# Altium PCB 4_TPS63060降压--升压转换器.PcbDoc
Units mil, origin at the board's own origin, x right, y up, seen from the top; angles counter-clockwise.
Board outline 1024.61 x 551.67 mil, 2 copper layers (Top Layer, Bottom Layer); 14 components, 9 nets, 37 pads, 28 vias.
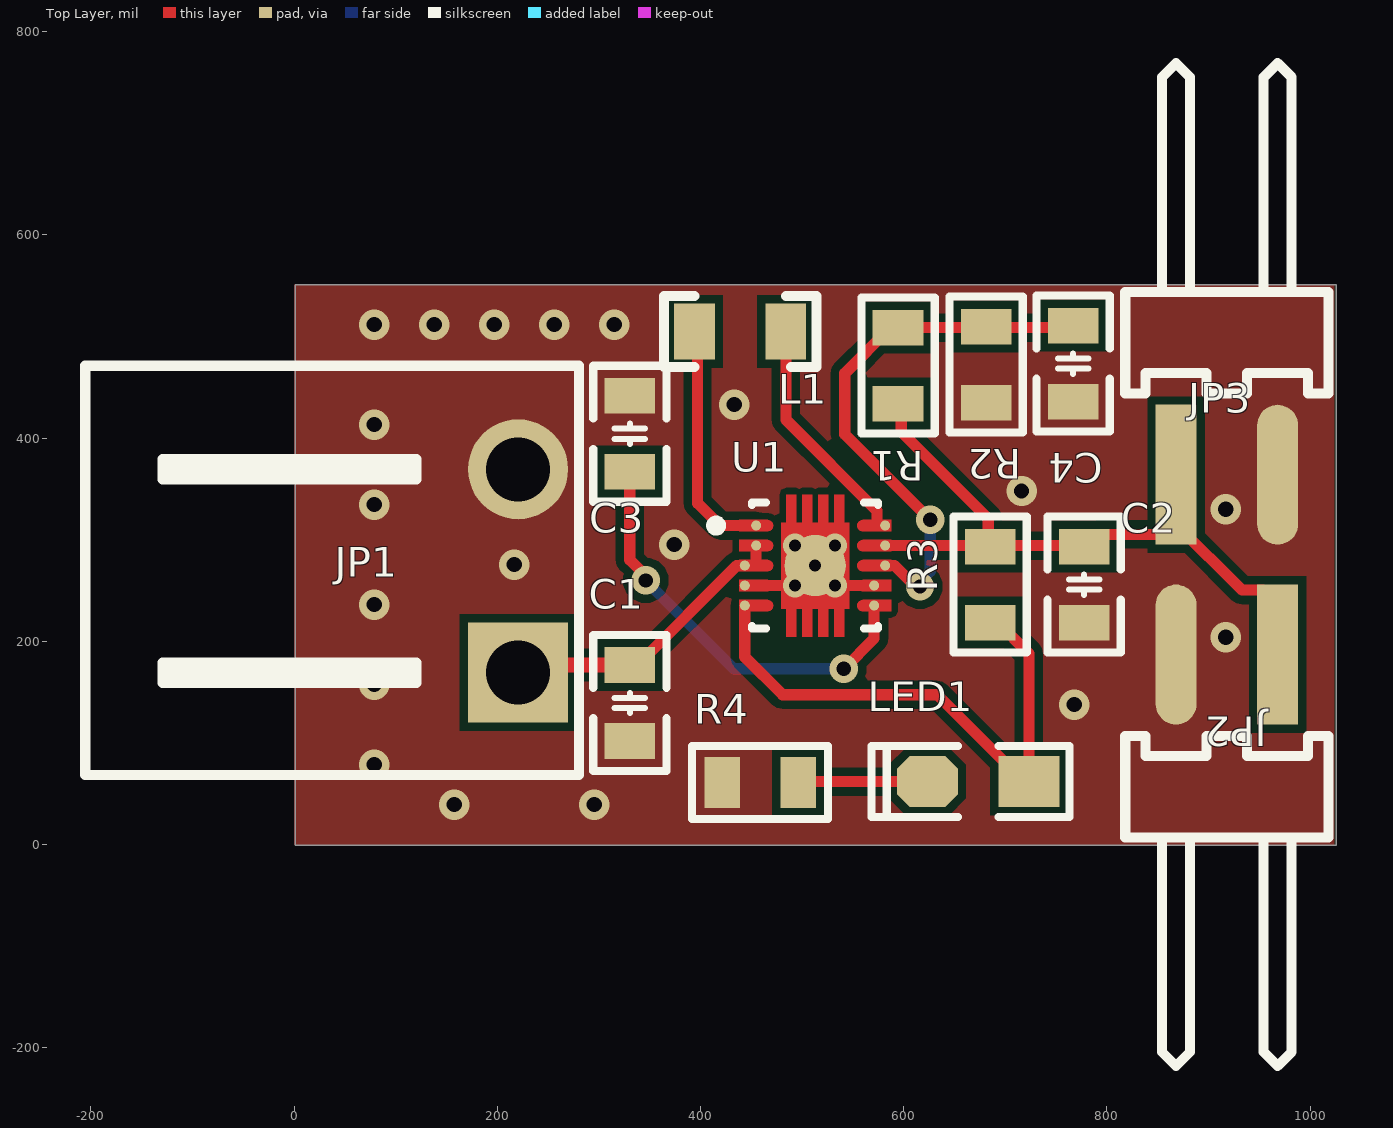
[diagram p0: Top Layer view]
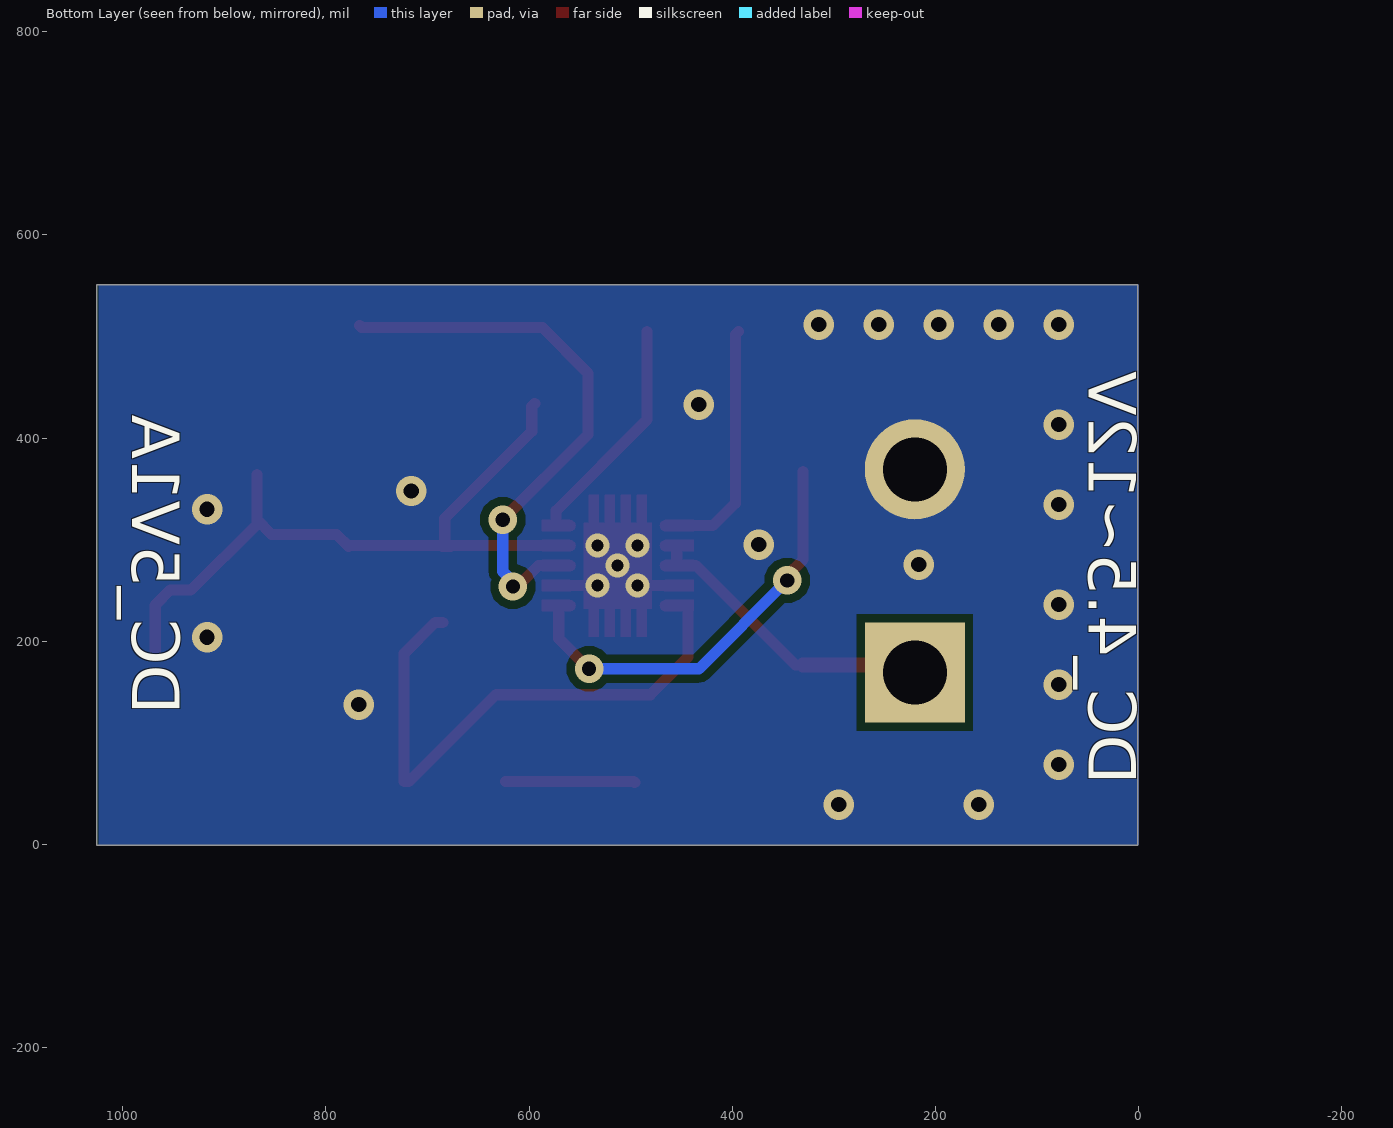
[diagram p1: Bottom Layer view, seen from below]

## Layer stack, top to bottom
Top Solder: solder mask 0.4, Solder Resist, Dk 3.5
Top Layer: signal copper 1.4
Dielectric 1: dielectric 12.6, FR-4, Dk 4.8
Bottom Layer: signal copper 1.4
Bottom Solder: solder mask 0.4, Solder Resist, Dk 3.5

## Board outline
0.98,-0.49 1025.59,-0.49 1025.59,551.18 0.98,551.18

## Design rules (kind name [scope] priority, off if disabled: settings)
Clearance [All] p1: gap=6 ignorepadtopadclearanceinfootprint=FALSE except(8: Arc-Poly Track-Poly SMDPad-Poly THPad-Poly Via-Poly Fill-Poly Poly-Poly)
PolygonConnect [All] p1: connectstyle=Direct reliefconductorwidth=10 reliefentries=4 polygonreliefangle="90 Angle" airgapwidth=10
RoutingVias [All] p1: holewidth=14 width=28 viastyle="Through Hole" minholewidth=1 minwidth=1 maxholewidth=28 maxwidth=50
SolderMaskExpansion [All] p1: expansion=4 istentingtop=FALSE
Width [All] p1: maxlimit=30 minlimit=1 preferedwidth=15
30 further rules are at their usual default settings.

## Components (designator, comment, footprint, x,y, rotation, side; value= is the part's Value field where it differs from the comment)
C1 "2X10uF" "C 0805_L" 330.39,139.33 r90 top
C2 "3X22uF" "C 0805_L" 777.56,255.91 r90 top
C3 "0.1uF" "C 0805_L" 330.39,404.33 r270 top
C4 "10pF" "C 0805_L" 766.73,473.43 r90 top
JP1 "HDR-1X2" KF2EDGK5.08-WI-2P 220.39,269.33 r90 top
JP2 "HDR-1X2" HDR2.54-WS-2P 918,187 r180 top
JP3 "HDR-1X2" HDR2.54-WS-2P 918,364 r0 top
L1 "1.5uH" "L 0805" 438.98,504.92 r0 top
LED1 "红色" "LED 0805G" 673.23,62.01 r180 top
R1 "1M" "R 0805_L" 594.49,471.46 r270 top
R2 "111K" "R 0805_L" 681.1,472.44 r90 top
R3 "1M" "R 0805_L" 685.04,255.91 r90 top
R4 "1K" "R 0805_L" 458.6,61 r0 top
U1 "TPS63060DSCR" FP-DSC0010G-MFG 512.8,274.61 r0 top

## Footprints (in the part's own frame and the unit in brackets; to place one, negate y for a bottom-side part, rotate by r counter-clockwise, add the part's x,y. Pads: shape width x height; smd on the part's side, far side on the other; paste and mask are expansions set on the pad)
"C 0805_L" [mil] "无极性贴片电容                                        淘宝ID:黄晶宝石"
  rect 35x50 smd: 1(-37.4,0) 2(37.4,0)
  silkscreen extent -67,-36 67,36, body extent -39,-24 39,24, height 20
FP-DSC0010G-MFG [mm]
  round 0.252 smd paste-1000 mask+0: 1(-1.475,1) 2(-1.475,0.5) 3(-1.76,0) 4(-1.76,-0.5) 5(-1.76,-1) 6(1.475,-1) 7(1.475,-0.5) 8(1.75,0) 9(1.75,0.5) 10(1.75,1)
  round 1.53 smd paste-1000 mask+0: 11(0,0)
  Top Layer region: -0.85,1.075 -0.725,1.075 -0.725,1.775 -0.475,1.775 -0.475,1.075 -0.325,1.075 -0.325,1.775 -0.075,1.775 -0.075,1.075 0.075,1.075 0.075,1.775 0.325,1.775 0.325,1.075 0.475,1.075 0.475,1.775 0.725,1.775 0.725,1.075 0.85,1.075 0.85,-1.075 0.725,-1.075 0.725,-1.775 0.475,-1.775 0.475,-1.075 0.325,-1.075 0.325,-1.775 0.075,-1.775 0.075,-1.075 -0.075,-1.075 -0.075,-1.775 -0.325,-1.775 -0.325,-1.075 -0.475,-1.075 -0.475,-1.775 -0.725,-1.775 -0.725,-1.075 -0.85,-1.075
  Top Layer region: 1.9,0.86 1.19,0.86 1.136,0.871 1.091,0.901 1.061,0.946 1.05,1 1.05,1 1.061,1.054 1.091,1.099 1.136,1.129 1.19,1.14 1.19,1.14 1.9,1.14
  Top Layer region: 1.9,0.36 1.19,0.36 1.136,0.371 1.091,0.401 1.061,0.446 1.05,0.5 1.05,0.5 1.061,0.554 1.091,0.599 1.136,0.629 1.19,0.64 1.19,0.64 1.9,0.64
  Top Layer region: 1.9,-0.14 1.19,-0.14 1.136,-0.129 1.091,-0.099 1.061,-0.054 1.05,0 1.05,0 1.061,0.054 1.091,0.099 1.136,0.129 1.19,0.14 1.19,0.14 1.9,0.14
  Top Layer region: 1.9,-0.64 1.19,-0.64 1.136,-0.629 1.091,-0.599 1.061,-0.554 1.05,-0.5 1.05,-0.5 1.061,-0.446 1.091,-0.401 1.136,-0.371 1.19,-0.36 1.19,-0.36 1.9,-0.36
  Top Layer region: 1.9,-1.14 1.19,-1.14 1.136,-1.129 1.091,-1.099 1.061,-1.054 1.05,-1 1.05,-1 1.061,-0.946 1.091,-0.901 1.136,-0.871 1.19,-0.86 1.19,-0.86 1.9,-0.86
  Top Layer region: -1.9,-0.86 -1.19,-0.86 -1.136,-0.871 -1.091,-0.901 -1.061,-0.946 -1.05,-1 -1.05,-1 -1.061,-1.054 -1.091,-1.099 -1.136,-1.129 -1.19,-1.14 -1.19,-1.14 -1.9,-1.14
  Top Layer region: -1.9,-0.36 -1.19,-0.36 -1.136,-0.371 -1.091,-0.401 -1.061,-0.446 -1.05,-0.5 -1.05,-0.5 -1.061,-0.554 -1.091,-0.599 -1.136,-0.629 -1.19,-0.64 -1.19,-0.64 -1.9,-0.64
  Top Layer region: -1.9,0.14 -1.19,0.14 -1.136,0.129 -1.091,0.099 -1.061,0.054 -1.05,0 -1.05,0 -1.061,-0.054 -1.091,-0.099 -1.136,-0.129 -1.19,-0.14 -1.19,-0.14 -1.9,-0.14
  Top Layer region: -1.9,0.64 -1.19,0.64 -1.136,0.629 -1.091,0.599 -1.061,0.554 -1.05,0.5 -1.05,0.5 -1.061,0.446 -1.091,0.401 -1.136,0.371 -1.19,0.36 -1.19,0.36 -1.9,0.36
  Top Layer region: -1.9,1.14 -1.19,1.14 -1.136,1.129 -1.091,1.099 -1.061,1.054 -1.05,1 -1.05,1 -1.061,0.946 -1.091,0.901 -1.136,0.871 -1.19,0.86 -1.19,0.86 -1.9,0.86
  silkscreen extent -2.6,-1.58 1.58,1.58, body extent -2,-1.88 2,1.88, height 0.25
HDR2.54-WS-2P [mm] "2P卧式贴片排针2.54"
  rect 1.02x3.5 smd: 1(-1.27,0)
  oval 1.02x3.5 smd: 2(1.27,0)
  silkscreen extent -2.54,2.03 2.54,10.29, body extent -2.54,-0.76 2.54,10.34, height 2.54
KF2EDGK5.08-WI-2P [mm] "卧插端子"
  rect 2.5x2.5 hole 1.6: 1(-2.54,0)
  round 2.5 hole 1.6: 2(2.54,0)
  silkscreen extent -5.11,-1.52 5.13,10.82, body extent -5.08,-0.5 5.08,10.8, height 8.5
"L 0805" [mil] "小功率贴片电感        淘宝ID:黄晶宝石"
  rect 40x55 smd: 1(-45,0) 2(45,0)
  silkscreen extent -75,-35 75,35, body extent -39,-24 39,24, height 35
"LED 0805G" [mil] "绿色0805LED"
  rect 60x50 smd: 1(-50,0)
  oct 60x50 smd: 2(50,0)
  silkscreen extent -90,-35 105,35, body extent -39,-25 39,25, height 32
"R 0805_L" [mil] "1/8W贴片电阻"
  rect 35x50 smd: 1(-37.4,0) 2(37.4,0)
  silkscreen extent -67,-36 67,36, body extent -39,-25 39,25, height 20

## Part data
C1 C2 C3 C4: library part C, "贴片电容", BOM名称=贴片电容, 下单链接=https://item.taobao.com/item.htm?ft=t&id=613637044352, 淘宝ID=小糖豆的小窝窝
JP1 JP2 JP3: library part "Header 2", "2P接插件", BOM名称=2P接插件, 下单链接=https://item.taobao.com/item.htm?ft=t&id=613637044352, 淘宝ID=小糖豆的小窝窝
L1: library part L, "小功率贴片电感", BOM名称=小功率贴片电感, 下单链接=https://item.taobao.com/item.htm?ft=t&id=613637044352
LED1: library part LED-SMD, "贴片LED", BOM名称=贴片LED, 下单链接=https://item.taobao.com/item.htm?ft=t&id=613637044352, 淘宝ID=小糖豆的小窝窝
R1 R2 R3 R4: library part R, "贴片电阻", BOM名称=贴片电阻, 下单链接=https://item.taobao.com/item.htm?ft=t&id=613637044352, 淘宝ID=小糖豆的小窝窝
U1: library part CMP-04918-000043-1, "IC REG BCK BST ADJ 2A 10WSON", Ambient Temperature Range High=+85°C, Ambient Temperature Range Low=-40°C, Manufacturer="Texas Instruments", Max Junction Temp=+125°C, Max Supply Voltage=12V, Min Supply Voltage=2.5V, Nominal Supply Current=30uA, Output Current=1A, Output Voltage=2.5-8V, Package=DSC0010G, Switching Frequency=2400kHz, Temperature="-40°C to +85°C", Automotive=No, Category=IC, ComponentLink2Description=Datasheet, ComponentLink2URL=http://www.ti.com/lit/ds/symlink/tps63060.pdf, Device Class L1="Integrated Circuits (ICs)", Device Class L2="Power Management ICs", Device Class L3="Voltage Regulators - Switching", Digikey Description="IC REG BCK BST ADJ 2A 10WSON", Height=0.8mm, Ipc Land Pattern Name=DFN300X300X70-10, Lead Free=Yes, Manufacturer Part Number=TPS63060DSCR, Max Duty Cycle=100%, Mouser Description="Voltage Regulators - Switching Regulators 2.5-12Vin,2.25A Sw Crnt Limit", Number Of Outputs=1, Octopart=https://octopart.com/tps63060dscr-texas+instruments-21396306, Output Type=AdjustableProgrammable, RoHS=TRUE, Standoff Height=0mm, Switching Topology=Buck-Boost, Temperature Range High=+85°C, Temperature Range Low=-40°C

## Via types
v1: diameter 30, hole 15, Top Layer to Bottom Layer, 19 vias
v2: diameter 23.62, hole 11.81, Top Layer to Bottom Layer, 5 vias
v3: diameter 28, hole 14, Top Layer to Bottom Layer, 4 vias

## Nets (pads, with @x,y where several pads share a name; then routed paths per layer and width w, separated by ;. In a path a pad name is that pad's centre, name@x,y a point inside that pad or via, vN(x,y) a via of type N, cw(c..) or ccw(c..) an arc to the next point about the centre after c; other vN are vias at no path point)
+12: C1.2 JP1.1 U1.2 U1.3 | length 297
  Top Layer w11: C1.2 337.9,176.73 435.65,274.48 U1.3@443.38,274.48 ; U1.3 454.05,274.61 454.72,275.28 U1.2
  Top Layer w15: JP1.1 227.79,176.73 C1.2
GND: C1.1 C2.1 C3.1 C4.1 JP1.2 JP2.2 JP3.2 R2.1 R4.1 U1.4 U1.7 U1.11 | length 121.9
  Top Layer w11: 449,255 570.79,255 U1.7
  other v1: 157.48,39.37 295.28,39.37 78.74,78.74 767.72,137.8 78.74,157.48 917,204 78.74,236.22 216.54,275.59 374.02,295.28 917,330 78.74,334.65 716,348 78.74,413.39 433.07,433.07 78.74,511.81 137.8,511.81 196.85,511.81 255.91,511.81 314.96,511.81
  other v2: 493.11,254.92 532.48,254.92 512.8,274.61 493.11,294.29 532.48,294.29
NetC2_2: C2.2 JP2.1 JP3.1 R1.2 R3.2 U1.9 | length 706.9
  Top Layer w11: U1.9 676.56,294.29 677.54,293.3 R3.2 683.14,295.21 683.14,320.86 597.5,406.5 597.5,431.05 R1.2 ; R3.2@685.04,294.29 776.57,294.29 C2.2 789.56,305.3 853.42,305.3 JP3.1@868,319.88 ; JP3.1 JP3.1@868,319.88 ; JP2.1 968,235.82 953.42,250.4 932.78,250.4 868,315.18 JP3.1@868,319.88
NetC3_2: C3.2 U1.6 | length 419
  Top Layer w11: C3.2 330.39,280.21 346,264.6 v3(346,260) ; v3(541,173) 570.87,202.87 U1.6
  Bottom Layer w11: v3(346,260) 433,173 v3(541,173)
NetC4_2: C4.2 R1.1 R2.2 U1.8 | length 535.8
  Top Layer w11: U1.8 590.79,274.61 611.4,254 v3(616,254) ; v3(626,319.79) 542,403.79 542,463.88 586.99,508.86 R1.1 764.77,508.86 C4.2
  Bottom Layer w11: v3(616,254) 616,258.6 626,268.6 v3(626,319.79)
NetL1_1: L1.1 U1.1 | length 237
  Top Layer w11: L1.1 397,501.9 397,336 419.02,313.98 U1.1
NetL1_2: L1.2 U1.10 | length 222.6
  Top Layer w11: L1.2 483.98,418.11 573.62,328.47 573.62,319.49
NetLED1_1: LED1.1 R3.1 U1.5 | length 557.9
  Top Layer w11: U1.5 443.5,184.5 480.5,147.5 632.74,147.5 718.23,62.01 LED1.1 723.23,187.81 692.54,218.5 R3.1
NetLED1_2: LED1.2 R4.2 | length 127.6
  Top Layer w11: R4.2 497.01,62.01 LED1.2

## Polygon pours and split planes (outlines as drawn)
GND on Top Layer "GND_L01_P000" (solid, remove dead copper, pour order 0): 0,551.18 1023.62,551.18 1023.62,0 0,0
GND on Bottom Layer "GND_L02_P001" (solid, remove dead copper, pour order 1): 0,551.18 1023.62,551.18 1023.62,0 0,0

## Silkscreen, mask and mechanical layers (free items; w line width, h text height)
Bottom Overlay:
  text "DC_5V1A" at 1005.87,128 h80 r90
  text "DC_4.5~12V" at 64.61,59.05 h80 r90
Mechanical 1:
  lines w10: 1024.61,-0.49 0.98,-0.49 0.98,551.18 1024.61,551.18 ; 1025.59,-0.49 1025.59,551.18